# Altium PCB PCB1.PcbDoc
Units mm, origin at the board's own origin, x right, y up, seen from the top; angles counter-clockwise.
Board outline 90 x 59 mm, 2 copper layers (Top Layer, Bottom Layer); 34 components, 29 nets, 186 pads, 37 vias.
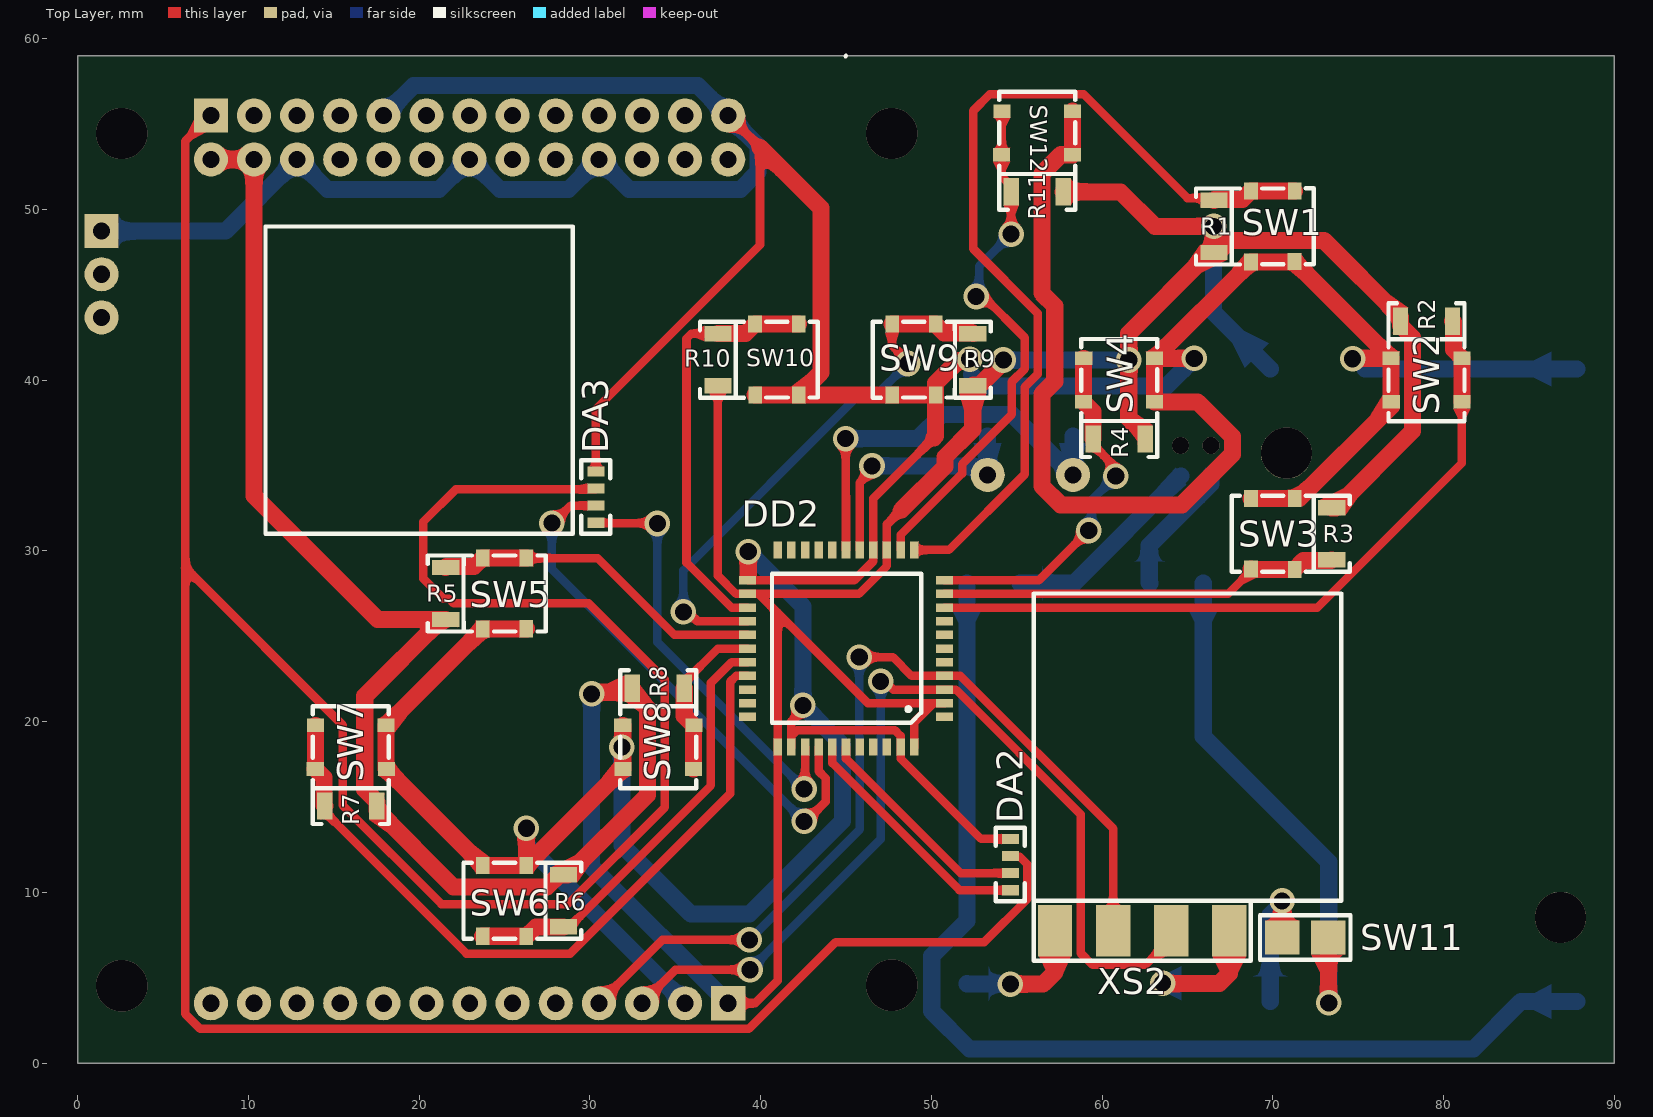
[diagram p0: Top Layer view]
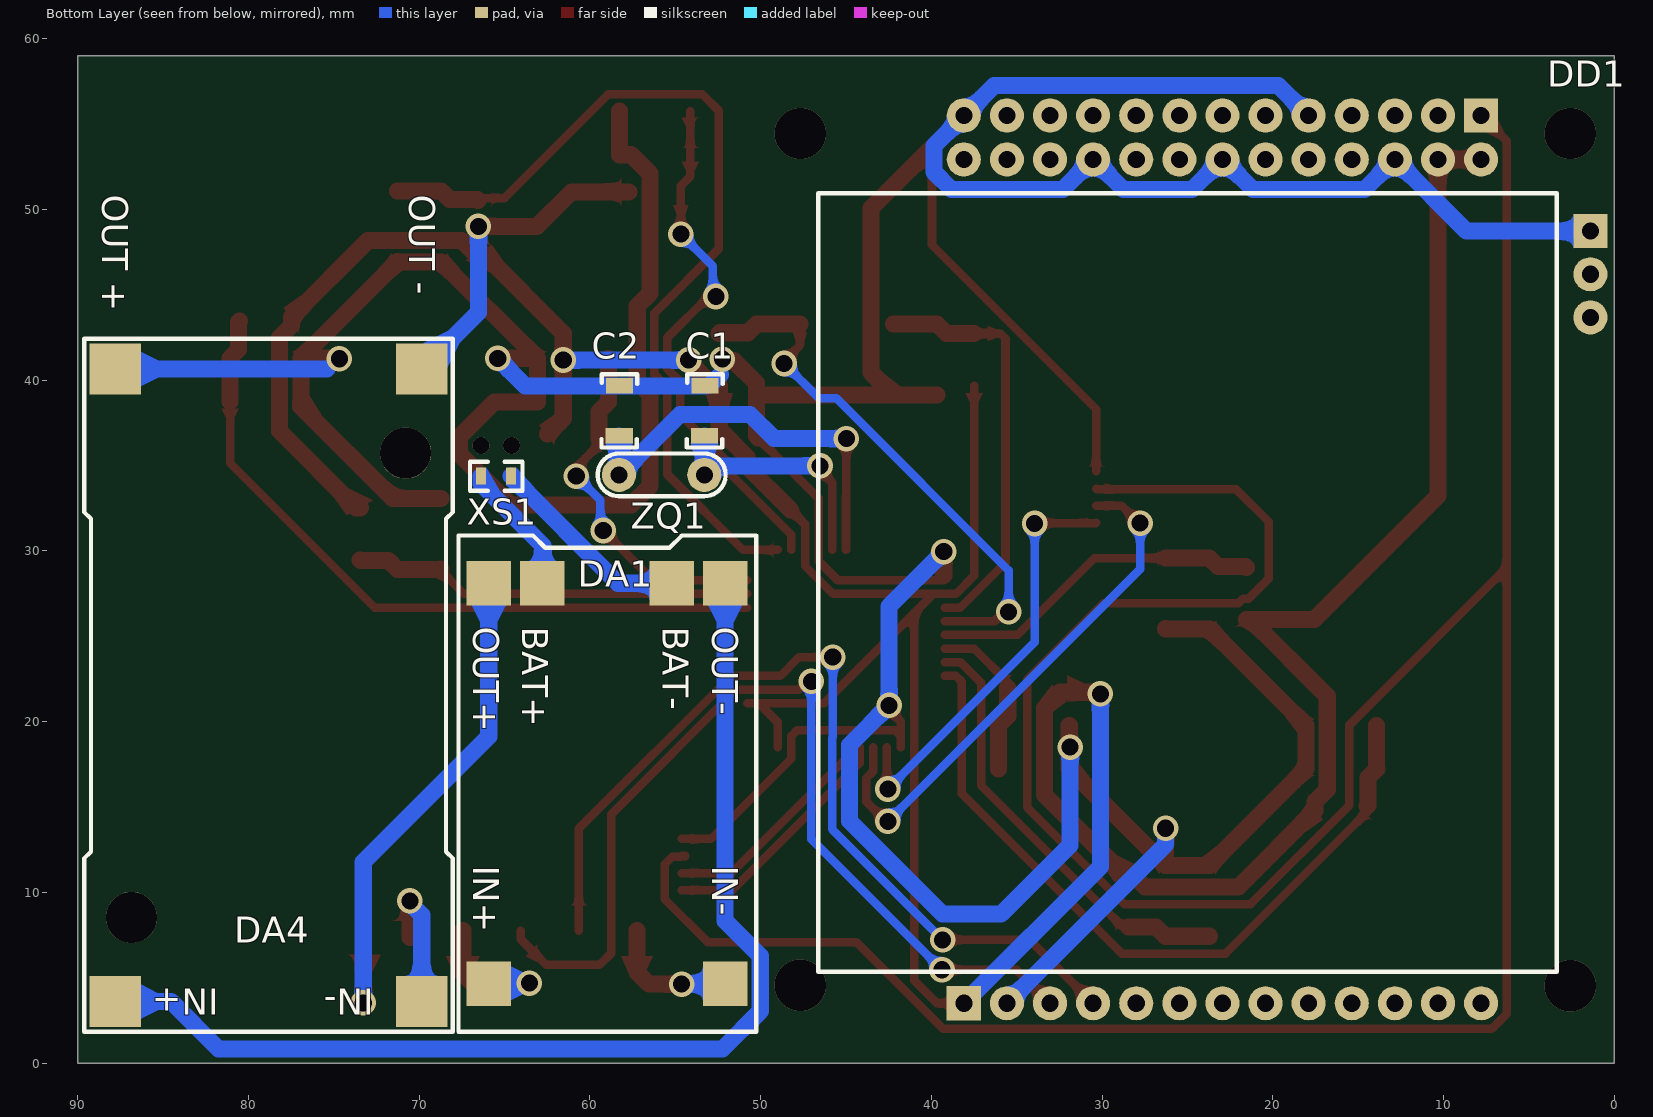
[diagram p1: Bottom Layer view, seen from below]
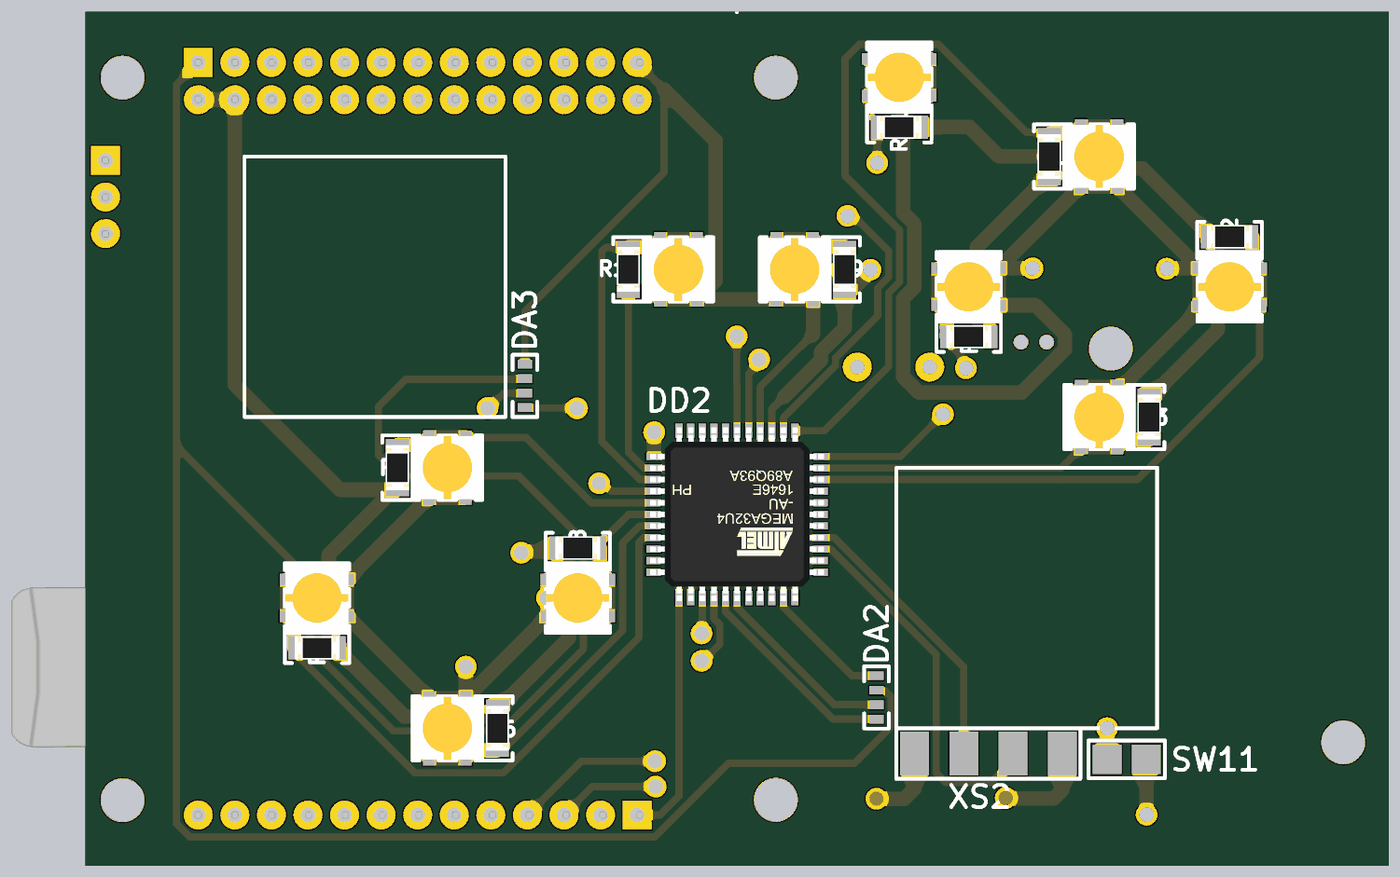
[diagram p2: 3D render of the assembled board from above, using the file's embedded part models]
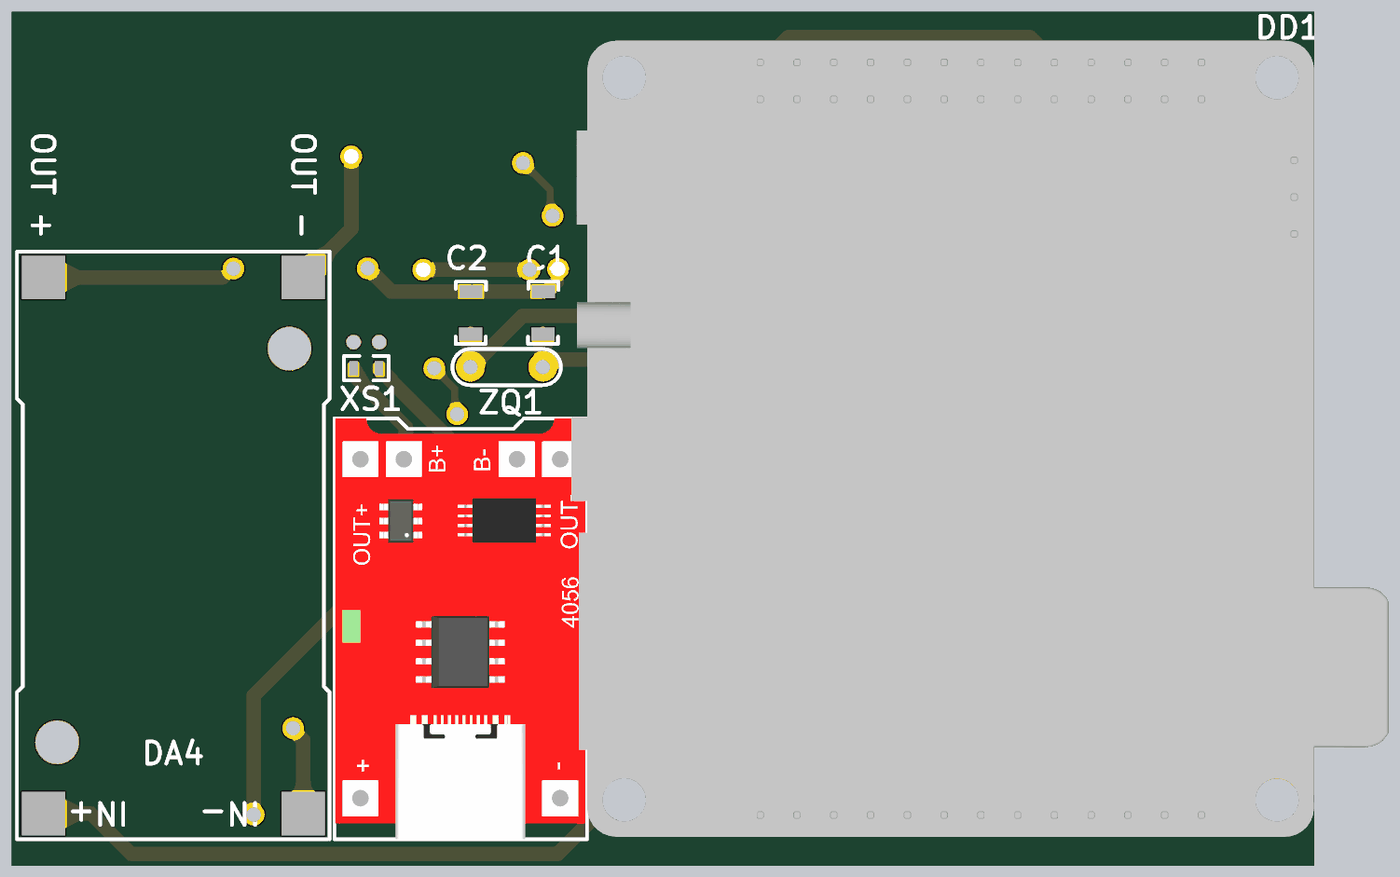
[diagram p3: 3D render of the assembled board from below, using the file's embedded part models]

## Layer stack, top to bottom
Top Solder: solder mask 0.0102, Solder Resist, Dk 3.5
Top Layer: signal copper 0.0356
Dielectric 1: dielectric 0.32, FR-4, Dk 4.8
Bottom Layer: signal copper 0.0356
Bottom Solder: solder mask 0.0102, Solder Resist, Dk 3.5

## Board outline
0,0 90,0 90,59 0,59

## Design rules (kind name [scope] priority, off if disabled: settings)
Clearance [All] p1: gap=0.254 ignorepadtopadclearanceinfootprint=FALSE
PolygonConnect [All] p1: connectstyle=Relief reliefconductorwidth=0.254 reliefentries=4 polygonreliefangle="90 Angle" airgapwidth=0.254
RoutingVias [All] p1: holewidth=1.5 width=1.5 viastyle="Through Hole" minholewidth=0.5 minwidth=1 maxholewidth=1 maxwidth=1.5
SolderMaskExpansion [All] p1: expansion=0.102 istentingtop=FALSE
SupplyNets "Schematic Supply Nets_2" [InNet('+3.3V')] p1: voltage=0.000
SupplyNets "Schematic Supply Nets_1" [InNet('GND')] p2: voltage=0.000
SupplyNets "Schematic Supply Nets" [InNet('+5V')] p3: voltage=0.000
Width [All] p1: maxlimit=1 minlimit=0.3 preferedwidth=0.5 minimp=50.000000 maximp=50.000000 favimp=50.000000
30 further rules are at their usual default settings.

## Components (designator, comment, footprint, x,y, rotation, side; value= is the part's Value field where it differs from the comment)
C1 "capasitor" "capacitor 1206" 53.275,38.2 r270 bottom
C2 "capasitor" "capacitor 1206" 58.275,38.2 r270 bottom
DA1 "1S 4056 BMS USB C" "1S 4056 BMS USB C" 59.1,16.8 r270 bottom locked
DA2 "joy stick 4 pin" "joy stick psp 4 pin" 54.625,11.625 r90 top
DA3 "joy stick 4 pin" "joy stick psp 4 pin" 30.35,33.15 r90 top
DA4 "DC-DC" DC-DC 78.825,22.125 r270 bottom locked
DD1 "orange PI ZERO 3" "orange Pi Zero 3" 25.125,29.5 r270 bottom locked
DD2 "ATmega32U4" atmega32u4 45,24.275 r180 top
R1 "resistor" "resistor 1206" 66.55,49 r270 top
R2 "resistor" "resistor 1206" 79,43.45 r180 top
R3 "resistor" "resistor 1206" 73.45,31 r90 top
R4 "resistor" "resistor 1206" 61,36.55 r0 top
R5 "resistor" "resistor 1206" 21.55,27.5 r270 top
R6 "resistor" "resistor 1206" 28.45,9.5 r90 top
R7 "resistor" "resistor 1206" 16,15.05 r0 top
R8 "resistor" "resistor 1206" 34,21.95 r180 top
R9 "resistor" "resistor 1206" 52.425,41.2 r270 top
R10 "resistor" "resistor 1206" 37.5,41.2 r270 top
R11 "resistor" "resistor 1206" 56.2,51.025 r0 top
SW1 "button" "membrane button" 70,49 r90 top
SW2 "button" "membrane button" 79,40 r0 top
SW3 "button" "membrane button" 70,31 r270 top
SW4 "button" "membrane button" 61,40 r180 top
SW5 "button" "membrane button" 25,27.5 r90 top
SW6 "button" "membrane button" 25,9.5 r270 top
SW7 "button" "membrane button" 16,18.5 r180 top
SW8 "button" "membrane button" 34,18.5 r0 top
SW9 "button" "membrane button" 48.975,41.2 r90 top
SW10 "button" "membrane button" 40.95,41.2 r90 top
SW11 "button" PowerButton 73.25,7.35 r180 top
SW12 "button" "membrane button" 56.2,54.475 r180 top
XS1 "power" power 65.475,34.35 r180 bottom
XS2 "TYPE-C" TYPE-C 62.35,7.75 r0 top
ZQ1 "quartz resonator" "quartz resonator 2" 55.8,34.45 r180 bottom

## Footprints (in the part's own frame and the unit in brackets; to place one, negate y for a bottom-side part, rotate by r counter-clockwise, add the part's x,y. Pads: shape width x height; smd on the part's side, far side on the other; paste and mask are expansions set on the pad)
"1S 4056 BMS USB C" [mm]
  rect 2.6x2.6 smd: 1(12.15,7.025) 2(12.15,-6.825) 3(-11.3,-3.7) 4(-11.3,3.9) 5(-11.3,7.025) 6(-11.3,-6.825)
  silkscreen extent -14.1,-8.6 14.97,8.85, body extent -14.11,-8.55 14.97,8.75, height 5.26
atmega32u4 [mm]
  rect 1x0.5 smd: 1(-5.775,4) 2(-5.775,3.2) 3(-5.775,2.4) 4(-5.775,1.6) 5(-5.775,0.8) 6(-5.775,0) 7(-5.775,-0.8) 8(-5.775,-1.6) 9(-5.775,-2.4) 10(-5.775,-3.2) 11(-5.775,-4) 23(5.775,-4) 24(5.775,-3.2) 25(5.775,-2.4) 26(5.775,-1.6) 27(5.775,-0.8) 28(5.775,0) 29(5.775,0.8) 30(5.775,1.6) 31(5.775,2.4) 32(5.775,3.2) 33(5.775,4)
  rect 0.5x1 smd: 12(-4,-5.775) 13(-3.2,-5.775) 14(-2.4,-5.775) 15(-1.6,-5.775) 16(-0.8,-5.775) 17(0,-5.775) 18(0.8,-5.775) 19(1.6,-5.775) 20(2.4,-5.775) 21(3.2,-5.775) 22(4,-5.775) 34(4,5.775) 35(3.2,5.775) 36(2.4,5.775) 37(1.6,5.775) 38(0.8,5.775) 39(0,5.775) 40(-0.8,5.775) 41(-1.6,5.775) 42(-2.4,5.775) 43(-3.2,5.775) 44(-4,5.775)
  silkscreen extent -4.4,-4.38 4.33,4.35, body extent -6,-6 6,6, height 1.05
"capacitor 1206" [mm]
  rect 0.9x1.6 smd: 1(-1.462,0.013) 2(1.463,-0.012)
  silkscreen extent -2.15,-1.05 2.15,1.05, body extent -1.56,-0.74 1.54,0.76, height 1.61
DC-DC [mm]
  rect 3x3 smd: 1(18.525,8.975) 2(18.525,-8.975) 3(-18.525,-8.975) 4(-18.525,8.975)
  round 3 hole 3: ""(-13.6,8.025) ""(13.6,-8.025)
  silkscreen extent -20.3,-10.8 20.3,10.8, body extent -20.1,-10.55 20.1,10.55, height 12.25
"joy stick psp 4 pin" [mm]
  rect 0.6x1 smd: 1(-1.5,0) 2(-0.5,0) 3(0.5,0) 4(1.5,0)
  silkscreen extent -2.15,-0.85 2.15,0.85
"membrane button" [mm]
  rect 1x0.8 smd: 1(-2.075,1.275) 1(-2.065,-1.274) 2(2.075,-1.275) 2(2.085,1.276)
  silkscreen extent -2.22,-2.41 2.23,2.4, body extent -2.22,-2.39 2.22,2.39, height 0.84
"orange Pi Zero 3" [mm]
  rect 2x2 hole 1: 1(-26,17.325) 27(-19.225,23.725) 42(26,-12.975)
  round 2 hole 1: 2(-26,14.8) 3(-26,12.275) 4(-26,9.75) 5(-26,7.225) 6(-26,4.7) 7(-26,2.175) 8(-26,-0.35) 9(-26,-2.875) 10(-26,-5.4) 11(-26,-7.925) 12(-26,-10.45) 13(-26,-12.975) 14(-23.425,17.325) 15(-23.425,14.8) 16(-23.425,12.275) 17(-23.425,9.75) 18(-23.425,7.225) 19(-23.425,4.7) 20(-23.425,2.175) 21(-23.425,-0.35) 22(-23.425,-2.875) 23(-23.425,-5.4) 24(-23.425,-7.925) 25(-23.425,-10.45) 26(-23.425,-12.975) 28(-16.7,23.725) 29(-14.175,23.725) 30(26,17.325) 31(26,14.8) 32(26,12.275) 33(26,9.75) 34(26,7.225) 35(26,4.7) 36(26,2.175) 37(26,-0.35) 38(26,-2.875) 39(26,-5.4) 40(26,-7.925) 41(26,-10.45)
  silkscreen extent -21.45,-21.5 24.15,21.75, body extent -27.5,-26.2 27.5,30.23, height 17.7
power [mm]
  rect 0.6x1 smd: 1(-0.9,0.025) 2(0.85,0.025)
  silkscreen extent -1.55,-0.82 1.53,0.88
PowerButton [mm]
  rect 2x2 smd: 1(0,0) 2(2.7,0)
  silkscreen extent -1.3,-1.3 4,1.3
"quartz resonator 2" [mm]
  round 2 hole 1: 1(-2.5,0) 2(2.5,0)
  silkscreen extent -3.75,-1.25 3.75,1.25
"resistor 1206" [mm]
  rect 0.9x1.6 smd: 1(-1.525,0) 2(1.525,0)
  silkscreen extent -2.22,-1.05 2.23,1.05, body extent -1.55,-0.8 1.55,0.8, height 0.56
TYPE-C [mm]
  rect 2x3 smd: 1(-5.1,0) 2(-1.7,0) 3(1.7,0) 4(5.1,0)
  silkscreen extent -6.36,-1.75 6.35,1.75

## Via types
v1: diameter 1.5, hole 1, Top Layer to Bottom Layer, 31 vias
v2: diameter 3, hole 3, Top Layer to Bottom Layer, 4 vias
v3: diameter 1, hole 1, Top Layer to Bottom Layer, 2 vias

## Nets (pads, with @x,y where several pads share a name; then routed paths per layer and width w, separated by ;. In a path a pad name is that pad's centre, name@x,y a point inside that pad or via, vN(x,y) a via of type N, cw(c..) or ccw(c..) an arc to the next point about the centre after c; other vN are vias at no path point)
+3.3V: DA2.3 DA3.3 DD1.1 | length 189.2
  Top Layer w0.5: DD1.1 6.296,53.996 6.296,29.017 ; DA3.3 30.3,33.6 22.137,33.6 20.246,31.709 20.246,28.366 21.407,27.205 21.74,27.205 22.016,26.929 29.921,26.929 34.383,22.467 34.383,14.974 28.715,9.307 21.306,9.307 15.525,15.087 15.525,19.788 6.296,29.017 ; DA2.3@54.425,12.125 DA2.3 54.675,12.075 55.188,12.075 55.629,11.634 55.629,9.616 53.088,7.075 44.388,7.075 39.309,1.996 7.177,1.996 6.296,2.877 6.296,29.017
+5V: DA4.4 DD1.14 DD1.15 DD1.42 DD2.2 DD2.14 DD2.24 DD2.34 DD2.44 R1.2 R2.2 R3.2 R4.2 R5.2 R6.2 R7.2 R8.2 R9.2 R10.2 R11.2 | length 246.3
  Top Layer w0.5: R10.2 37.5,28.537 38.562,27.475 39.888,27.475 ; DD1.42 39.675,3.5 41,4.825 41,26.363 ; 48.25,32.4 47.4,31.55 DD2.14 47.4,29.121 45.754,27.475 39.888,27.475 ; DD2.44 49,19.963 50.112,21.075 ; DD2.2 50.112,21.075 ; 39.888,27.475 41,26.363 ; 41,26.363 46.288,21.075 50.112,21.075
  Top Layer w1: DD1.14 DD1.15 10.325,33.225 17.575,25.975 R5.2 ; R5.2@21.3,25.975 16.811,21.486 16.811,16.014 17.525,15.3 R7.2 17.525,14.8 22.014,10.311 27.486,10.311 28.2,11.025 R6.2 28.7,11.025 33.379,15.704 33.379,20.796 32.454,21.721 30.196,21.721 v1(30.1,21.625) ; 48.25,32.4 50.792,34.942 50.792,35.489 52.425,37.122 R9.2 52.475,39.725 52.865,39.725 54.213,41.073 v1(54.213,41.175) ; R11.2 61.08,51.025 63.097,49.008 v1(66.537,49.008) R1.2@66.537,47.525 ; R4.2@62.475,36.85 61.561,37.764 61.561,42.736 R1.2@66.25,47.425 ; R1.2@66.8,47.475 67.514,48.189 72.986,48.189 77.475,43.7 R2.2 77.475,43.2 78.189,42.486 78.189,37.014 73.7,32.525 R3.2
  Bottom Layer w1: v1(30.1,21.625) 30.1,11.5 DD1.42 ; v1(54.213,41.175) v1(61.561,41.175) ; v1(66.537,49.008) 66.525,48.996 66.525,43.975 DA4.4
GND: C1.1 C2.1 DA2.4 DA3.4 DA4.3 DD1.5 DD1.13 DD1.16 DD1.20 DD1.23 DD1.27 DD1.41 DD2.15 DD2.23 DD2.35 DD2.43 SW1.1 SW2.1 SW3.1 SW4.1 SW5.1 SW6.1 SW7.1 SW8.1 SW9.1 SW10.1 SW12.1 | length 364.5
  Top Layer w0.5: DA3.4 30.35,38.304 39.963,47.917 39.963,53.637 DD1.13 ; DD2.23@39.275,28.275 45.488,28.275 46.6,29.387 DD2.15 46.6,33.07 50.152,36.622 ; DD2.35 41.8,19.163 ; v1(42.475,20.95) 42.475,20.679 41.8,20.004 41.8,19.163 ; DA2.4 52.912,13.125 48.2,17.837 DD2.43 48.2,19.163 47.859,19.504 42.141,19.504 41.8,19.163
  Top Layer w1: SW5.1@26.274,25.435 26.264,25.425 23.725,25.425 23.715,25.425 18.065,19.774 18.065,17.235 18.075,17.225 18.075,17.215 23.726,11.565 26.265,11.565 SW6.1@26.275,11.575 ; v1(26.275,13.75) SW6.1@26.275,11.575 ; SW8.1@31.925,19.775 31.925,17.226 SW6.1@26.275,11.575 ; 39.275,28.55 v1(39.275,29.95) ; SW10.1@39.675,39.125 42.214,39.125 SW10.1@42.224,39.135 ; 39.963,53.637 43.525,50.075 43.525,40.436 SW10.1@42.224,39.135 ; 50.152,36.622 50.249,36.72 50.249,39.135 50.239,39.125 47.7,39.125 47.69,39.135 SW10.1@42.224,39.135 ; SW9.1@50.25,39.25 50.25,39.816 51.57,41.136 52.15,41.136 v1(52.245,41.232) ; SW12.1@58.265,55.749 58.265,53.21 58.275,53.2 57.584,53.2 56.471,52.087 56.471,45.09 57.225,44.336 57.225,39.927 56.471,39.173 56.471,33.798 57.573,32.696 64.669,32.696 67.629,35.656 67.629,36.694 65.598,38.725 63.075,38.725 63.075,41.264 SW4.1@63.065,41.274 ; v1(65.4,41.275) 63.065,41.275 68.715,46.925 68.725,46.925 71.264,46.925 71.274,46.935 76.925,41.285 SW2.1@76.925,41.275 ; SW3.1@68.726,33.065 68.736,33.075 71.275,33.075 71.55,33.075 76.935,38.46 76.935,38.726 76.925,38.736 SW2.1@76.925,41.275 ; v1(74.675,41.25) 74.7,41.275 SW2.1@76.925,41.275
  Bottom Layer w1: DD1.27 8.65,48.725 DD1.16 12.878,52.925 14.632,51.171 21.168,51.171 22.922,52.925 DD1.20 22.978,52.925 24.732,51.171 28.743,51.171 30.497,52.925 DD1.23 30.553,52.925 32.307,51.171 38.827,51.171 39.854,52.198 39.854,53.718 38.1,55.472 DD1.13 38.072,55.5 36.318,57.254 19.682,57.254 17.928,55.5 DD1.5 ; v1(26.275,13.75) 26.275,12.8 DD1.41 ; v1(31.875,18.5) 31.875,12.757 35.91,8.722 39.347,8.722 44.8,14.175 44.8,18.625 v1(42.475,20.95) 42.475,26.75 v1(39.275,29.95) ; 52.341,40.334 C1.1@52.962,39.712 ; C1.1 C2.1 63.787,39.662 v1(65.4,41.275) ; 75.41,40.65 DA4.3
NetC1_2: C1.2 DD2.16 ZQ1.2 | length 14.5
  Top Layer w0.5: DD2.16 45.8,33.979 46.525,34.704 v1(46.525,34.975)
  Bottom Layer w1: v1(46.525,34.975) 52.504,34.975 53.029,34.45 ZQ1.2 53.294,34.456 53.294,36.731 C1.2
NetC2_2: C2.2 DD2.17 ZQ1.1 | length 24.2
  Top Layer w0.5: v1(44.975,36.575) 44.975,33.219 45,33.194 DD2.17
  Bottom Layer w1: v1(44.975,36.575) 49.205,36.575 50.622,37.991 54.717,37.991 58.259,34.45 ZQ1.1 58.294,34.456 58.294,36.731 C2.2
NetDA1_1: DA1.1 XS2.1 | length 7.9
  Top Layer w1: v1(54.625,4.625) 56.55,4.625 57.25,5.325 XS2.1
  Bottom Layer w1: DA1.1 52.088,4.637 54.613,4.637 v1(54.625,4.625)
NetDA1_2: DA1.2 XS2.4 | length 9.1
  Top Layer w1: v1(63.55,4.675) 63.575,4.65 66.864,4.65 67.45,5.236 XS2.4
  Bottom Layer w1: v1(63.55,4.675) 63.562,4.663 65.912,4.663 DA1.2
NetDA1_3: DA1.3 XS1.1 | length 7.8
  Bottom Layer w1: DA1.3 62.764,28.136 62.764,30.314 66.375,33.925 XS1.1
NetDA1_4: DA1.4 XS1.2 | length 12
  Bottom Layer w1: DA1.4 58.35,28.1 XS1.2
NetDA1_5: DA1.5 DA4.2 | length 65.8
  Bottom Layer w1: DA1.5 52.075,8.316 50.021,6.262 50.021,3.038 52.234,0.825 81.75,0.825 84.525,3.6 DA4.2
NetDA1_6: DA1.6 SW11.1 | length 31.5
  Top Layer w1: SW11.1 73.263,7.338 73.263,3.537 v1(73.275,3.525)
  Bottom Layer w1: DA1.6 65.925,19.124 73.275,11.774 v1(73.275,3.525)
NetDA2_1: DA2.1 DD2.38 | length 14.4
  Top Layer w0.5: DD2.38 44.2,17.571 51.646,10.125 DA2.1
NetDA2_2: DA2.2 DD2.39 | length 13.1
  Top Layer w0.5: DD2.39 45,17.837 51.712,11.125 DA2.2
NetDA3_1: DA3.1 DD2.36 | length 25.2
  Top Layer w0.5: DA3.1 30.375,31.625 33.925,31.625 v1(33.95,31.6) ; v1(42.55,16.05) 42.6,16.1 DD2.36
  Bottom Layer w0.5: v1(33.95,31.6) 33.95,24.65 v1(42.55,16.05)
NetDA3_2: DA3.2 DD2.37 | length 31.6
  Top Layer w0.5: v1(27.775,31.625) 27.846,31.625 28.871,32.65 DA3.2 ; v1@42.649,14.151 43.804,15.306 43.804,16.688 43.4,17.092 DD2.37
  Bottom Layer w0.5: v1(27.775,31.625) 27.775,28.926 v1(42.55,14.151)
NetDA4_1: DA4.1 SW11.2 | length 8.4
  Top Layer w1: SW11.2 v1(70.55,9.5) 70.6,9.45 v1@70.6,9.425
  Bottom Layer w1: DA4.1 69.85,8.665 70.55,9.365 v1(70.55,9.5)
NetDD1_39: DD1.39 DD2.4 XS2.2 | length 55.1
  Top Layer w0.5: DD1.39 34.243,7.218 v1(39.34,7.218) 39.35,7.208 v1@39.35,6.775 ; v1(45.775,23.775) 47.745,23.775 48.845,22.675 DD2.4 51.704,22.675 60.65,13.729 XS2.2
  Bottom Layer w0.5: v1(39.34,7.218) 45.804,13.682 45.804,19.041 45.771,19.074 45.771,23.771 v1(45.775,23.775)
NetDD1_40: DD1.40 DD2.3 XS2.3 | length 57
  Top Layer w0.5: DD1.40 35.014,5.464 v1(39.379,5.464) 39.379,5.454 v1@39.375,5.45 ; v1(47.025,22.35) 47.296,22.35 47.771,21.875 51.438,21.875 58.754,14.559 58.754,6.433 59.441,5.746 62.546,5.746 64.05,7.25 XS2.3
  Bottom Layer w0.5: v1(39.379,5.464) 47.025,13.11 v1(47.025,22.35)
NetDD2_9: DD2.9 R2.1 SW2.2 | length 42.3
  Top Layer w0.5: DD2.9 72.613,26.675 81.075,35.137 SW2.2@81.075,38.725
  Top Layer w1: R2.1 80.575,43.4 80.575,41.786 81.085,41.276 SW2.2@81.085,38.735
NetDD2_10: DD2.10 R3.1 SW3.2 | length 23.6
  Top Layer w0.5: DD2.10 67.375,27.475 68.725,28.825 SW3.2@68.725,28.925
  Top Layer w1: SW3.2@68.725,28.925 68.735,28.915 71.276,28.915 71.786,29.425 73.4,29.425 R3.1
NetDD2_11: DD2.11 R4.1 SW4.2 | length 21.2
  Top Layer w0.5: DD2.11 56.3,28.275 v1(59.217,31.192) ; R4.1 59.475,36.2 60.609,35.066 60.609,34.566 v1(60.8,34.375)
  Top Layer w1: SW4.2@58.925,41.275 58.915,41.265 58.915,38.724 59.475,38.164 R4.1
  Bottom Layer w0.5: v1(59.217,31.192) 59.388,31.363 59.388,32.963 v1(60.8,34.375)
NetDD2_12: DD2.12 R1.1 SW1.2 | length 53.5
  Top Layer w0.5: DD2.12 51.027,30.05 55.467,34.49 55.467,39.589 56.221,40.343 56.221,43.92 52.45,47.691 52.45,55.775 53.428,56.753 58.91,56.753 65,50.664 66.411,50.664 R1.1
  Top Layer w1: R1.1 66.6,50.575 68.214,50.575 68.724,51.085 71.265,51.085 SW1.2@71.275,51.075
NetDD2_13: DD2.13 R11.1 SW12.2 | length 31.2
  Top Layer w0.5: DD2.13 48.2,30.93 51.796,34.526 51.796,35.073 54.713,37.99 54.713,39.902 55.467,40.656 55.467,42.483 53.03,44.92 52.645,44.92 v1(52.625,44.9) ; SW12.2@54.125,55.75 54.12,55.745 54.12,53.205 54.115,53.199 54.115,51.935 54.675,51.375 R11.1 v1(54.675,48.55)
  Bottom Layer w0.5: v1(52.625,44.9) 52.796,45.071 52.796,46.671 v1(54.675,48.55)
NetDD2_25: DD2.25 R10.1 SW10.2 | length 24.7
  Top Layer w0.5: R10.1 35.95,42.725 35.657,42.432 35.657,29.314 38.296,26.675 DD2.25
  Top Layer w1: R10.1 39.114,42.725 39.674,43.285 42.215,43.285 SW10.2@42.225,43.275
NetDD2_26: DD2.26 R9.1 SW9.2 | length 32.2
  Top Layer w0.5: v1(35.475,26.425) 35.746,26.425 36.296,25.875 DD2.26 ; SW9.2@47.699,43.285 47.699,42.035 48.625,41.11 v1(48.625,40.975)
  Top Layer w1: SW9.2@47.699,43.285 50.24,43.285 50.25,43.275 50.75,42.775 52.375,42.775 R9.1
  Bottom Layer w0.5: v1(35.475,26.425) 35.475,28.848 45.566,38.939 46.589,38.939 v1(48.625,40.975)
NetDD2_27: DD2.27 R5.1 SW5.2 | length 19.8
  Top Layer w0.5: SW5.2@26.275,29.575 30.45,29.575 34.95,25.075 DD2.27
  Top Layer w1: R5.1 21.6,29.075 23.214,29.075 23.724,29.585 26.265,29.585 SW5.2@26.275,29.575
NetDD2_28: DD2.28 R8.1 SW8.2 | length 9.8
  Top Layer w0.5: R8.1 35.525,22.3 37.5,24.275 DD2.28
  Top Layer w1: R8.1 35.525,20.336 36.085,19.776 36.075,19.765 SW8.2@36.075,17.225
NetDD2_29: DD2.29 R6.1 SW6.2 | length 25.7
  Top Layer w0.5: R6.1 28.8,7.975 37.089,16.264 37.089,22.268 38.296,23.475 DD2.29
  Top Layer w1: SW6.2@23.725,7.425 26.265,7.425 26.276,7.415 26.836,7.975 R6.1
NetDD2_30: DD2.30 R7.1 SW7.2 | length 44.1
  Top Layer w0.5: R7.1 14.475,14.7 22.764,6.411 28.848,6.411 38.221,15.783 38.221,22.334 38.562,22.675 DD2.30
  Top Layer w1: SW7.2@13.925,19.775 13.925,17.235 13.915,17.224 14.425,16.714 14.425,15.1 R7.1
pads on no net: DA4. DD1.2 DD1.3 DD1.4 DD1.6 DD1.7 DD1.8 DD1.9 DD1.10 DD1.11 DD1.12 DD1.17 DD1.18 DD1.19 DD1.21 DD1.22 DD1.24 DD1.25 DD1.26 DD1.28 DD1.29 DD1.30 DD1.31 DD1.32 DD1.33 DD1.34 DD1.35 DD1.36 DD1.37 DD1.38 DD2.1 DD2.5 DD2.6 DD2.7 DD2.8 DD2.18 DD2.19 DD2.20 DD2.21 DD2.22 DD2.31 DD2.32 DD2.33 DD2.40 DD2.41 DD2.42
copper on no net:
  other v2: 2.575,4.525 47.675,4.55 2.575,54.45 47.675,54.45
  other v3: 64.6,36.175 66.375,36.175

## Silkscreen, mask and mechanical layers (free items; w line width, h text height)
Top Overlay:
  lines w0.254: 44.975,58.975 45,59 ; 11,31 11,49 29,49 29,31 11,31 ; 56,9.5 56,27.5 74,27.5 74,9.5 56,9.5
Mechanical 1:
  lines w0.254: 0,2 0,0 ; 0,0 90,0 90,59 0,59 0,0

## Text inside footprints (layer, text, board x,y; h text height)
DA1: Bottom Overlay "OUT+" at 66.846,25.546 h1.52 r90; Bottom Overlay "OUT-" at 52.846,25.546 h1.52 r90; Bottom Overlay "BAT-" at 55.721,25.546 h1.52 r90; Bottom Overlay "BAT+" at 63.971,25.546 h1.52 r90; Bottom Overlay "IN+" at 66.846,11.546 h1.52 r90; Bottom Overlay "IN-" at 52.846,11.546 h1.52 r90
DA4: Bottom Overlay "OUT -" at 70.571,50.871 h1.52 r90; Bottom Overlay "OUT +" at 88.571,50.871 h1.52 r90; Bottom Overlay "IN+" at 81.754,4.346 h1.52 r180; Bottom Overlay "IN-" at 72.654,4.346 h1.52 r180